# Altium PCB shelfControl.PcbDoc
Units mm, origin at the board's own origin, x right, y up, seen from the top; angles counter-clockwise.
Board outline 152.4 x 101.6 mm, 2 copper layers (Top Layer, Bottom Layer); 73 components, 56 nets, 184 pads, 9 vias.
Unrouted connection lines stored in the file: 77.
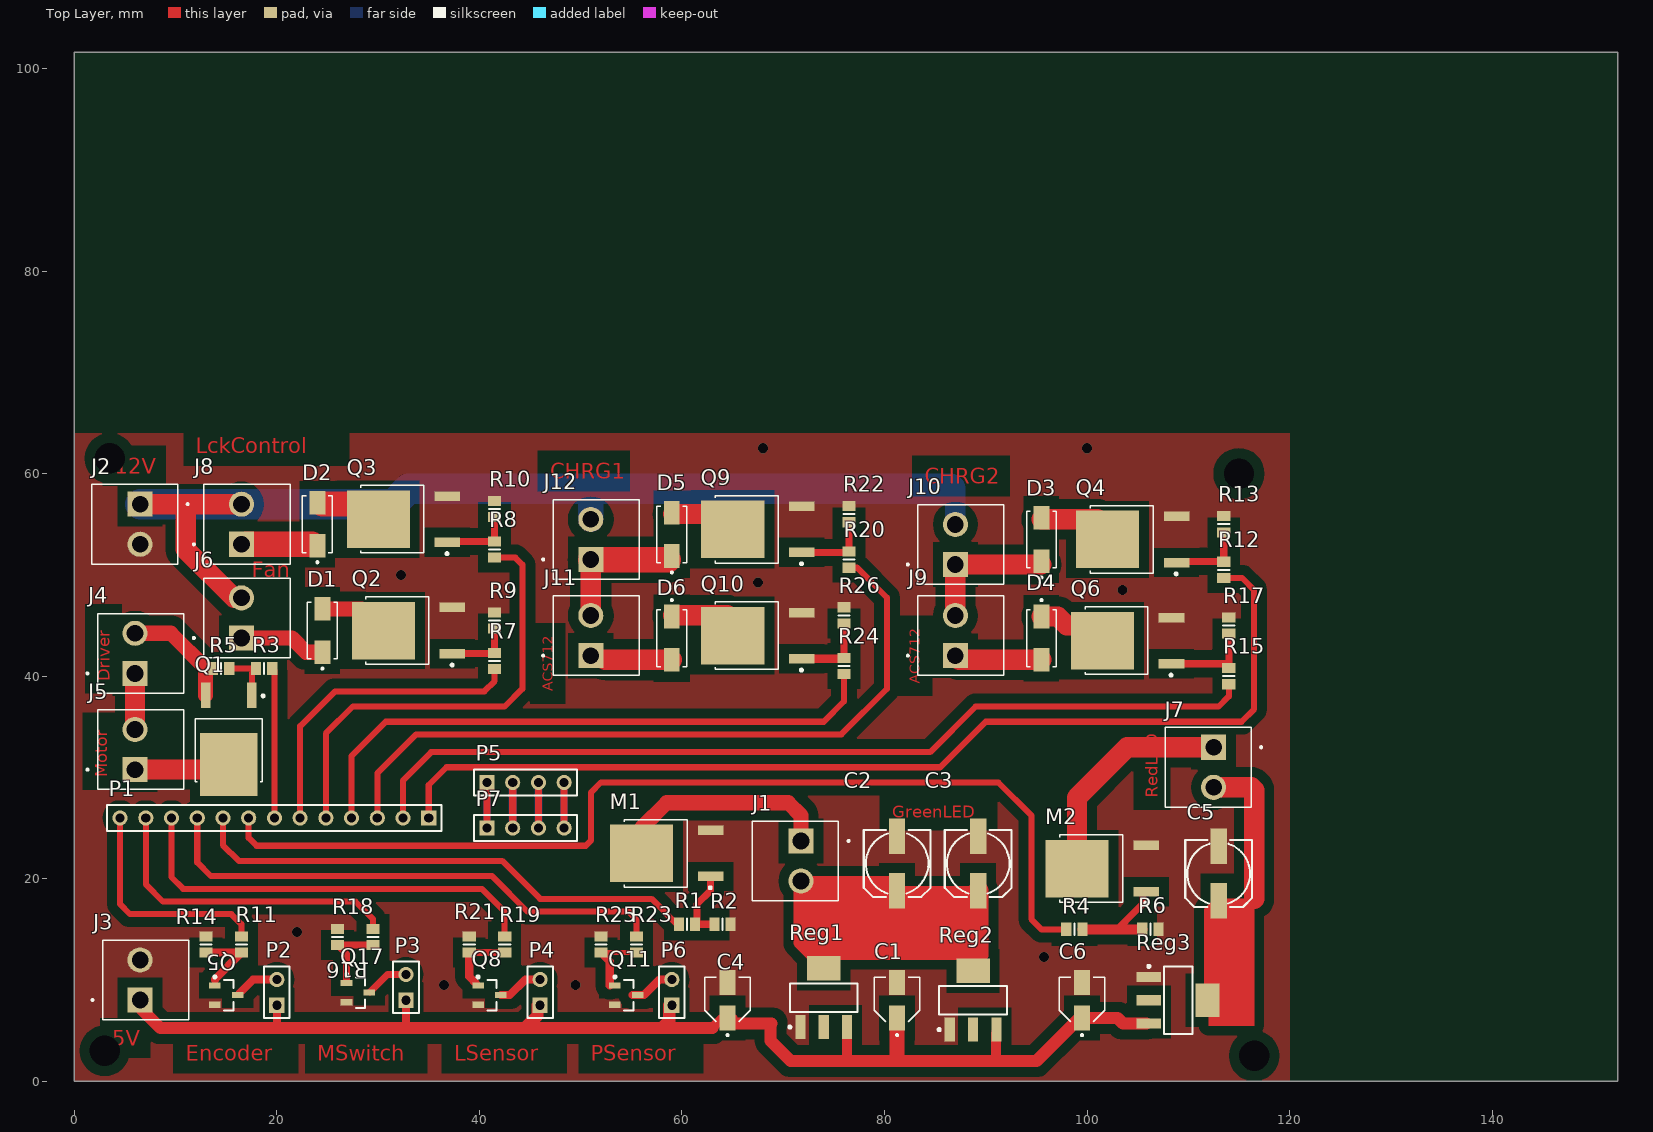
[diagram p0: Top Layer view]
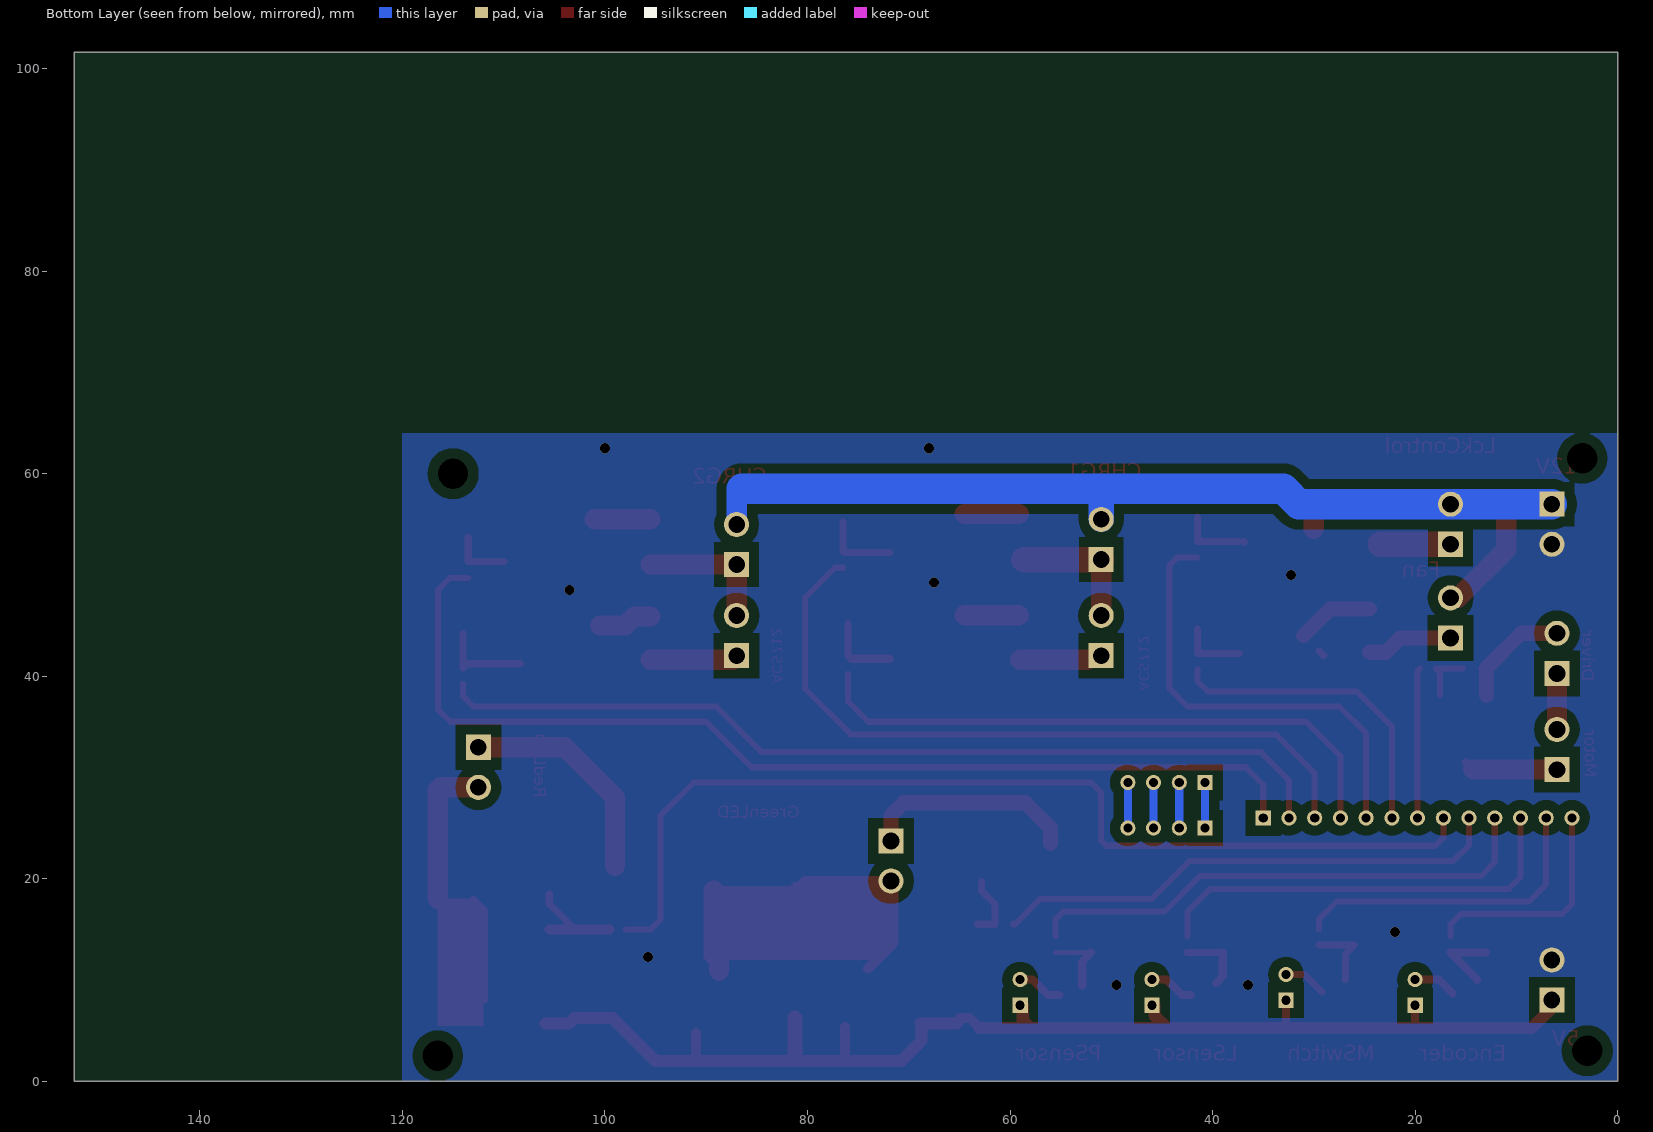
[diagram p1: Bottom Layer view, seen from below]

## Layer stack, top to bottom
Top Solder: solder mask 0.0102, Solder Resist, Dk 3.5
Top Layer: signal copper 0.0356
Dielectric 1: dielectric 0.32, FR-4, Dk 4.8
Bottom Layer: signal copper 0.0356
Bottom Solder: solder mask 0.0102, Solder Resist, Dk 3.5

## Board outline
0,0 152.4,0 152.4,101.6 0,101.6

## Design rules (kind name [scope] priority, off if disabled: settings)
Clearance [All] p1: gap=1 ignorepadtopadclearanceinfootprint=FALSE
PlaneConnect [All] p1: planeconnectstyle=Direct reliefexpansion=0.508 reliefentries=4 reliefconductorwidth=0.254 reliefairgap=0.254
PolygonConnect [All] p1: connectstyle=Direct reliefconductorwidth=0.254 reliefentries=4 polygonreliefangle="90 Angle" airgapwidth=0.254
RoutingVias [All] p1: holewidth=0.711 width=1.27 viastyle="Through Hole" minholewidth=0.711 minwidth=1.27 maxholewidth=0.711 maxwidth=1.27
SolderMaskExpansion [All] p1: expansion=0.102
Width [All] p1: maxlimit=0.254 minlimit=0.254 preferedwidth=0.254
29 further rules are at their usual default settings.

## Components (designator, comment, footprint, x,y, rotation, side; value= is the part's Value field where it differs from the comment)
C1 "4mm Electrolytic-10nf" *CAP_EEE-FP1C100AR 81.25,8 r90 top
C2 "100uf" *CAPAE0607X600N_16SVPC100M(Primary) 81.25,21.5 r270 top
C3 "100uf" *CAPAE0607X600N_16SVPC100M(Primary) 89.25,21.5 r270 top
C4 "4mm Electrolytic-10nf" *CAP_EEE-FP1C100AR 64.5,8 r90 top
C5 "100uf" *CAPAE0607X600N_16SVPC100M(Primary) 113,20.5 r270 top
C6 "4mm Electrolytic-10nf" *CAP_EEE-FP1C100AR 99.5,8 r90 top
D1 "SM330A" *DIOM5227X270N_S1M(Primary) 24.5,44.5 r90 top
D2 "SM330A" *DIOM5227X270N_S1M(Primary) 24,55 r90 top
D3 "SM330A" *DIOM5227X270N_S1M(Primary) 95.5,53.5 r90 top
D4 "SM330A" *DIOM5227X270N_S1M(Primary) 95.5,43.75 r270 top
D5 "SM330A" *DIOM5227X270N_S1M(Primary) 59,54 r90 top
D6 "SM330A" *DIOM5227X270N_S1M(Primary) 59,43.75 r270 top
J1 "6-1123723-2" *TE_6-1123723-2 71.75,21.75 r270 top
J2 "6-1123723-2" *TE_6-1123723-2 6.5,55 r270 top
J3 "6-1123723-2" *TE_6-1123723-2 6.5,10 r90 top
J4 "6-1123723-2" *TE_6-1123723-2 6,42.25 r90 top
J5 "6-1123723-2" *TE_6-1123723-2 6,32.75 r90 top
J6 "6-1123723-2" *TE_6-1123723-2 16.5,45.75 r90 top
J7 "6-1123723-2" *TE_6-1123723-2 112.5,31 r270 top
J8 "6-1123723-2" *TE_6-1123723-2 16.5,55 r90 top
J9 "ACS712Measure" *TE_6-1123723-2 87,44 r90 top
J10 "6-1123723-2" *TE_6-1123723-2 87,53 r90 top
J11 "ACS712Measure" *TE_6-1123723-2 51,44 r90 top
J12 "6-1123723-2" *TE_6-1123723-2 51,53.5 r90 top
M1 "PHD45N03" *DPAK228P998X235-3N 58.5,22.5 r90 top
M2 "PHD45N03" *DPAK228P998X235-3N 101.5,21 r90 top
P1 "Header 13" HDR1X13 35,26 r180 top
P2 "Header 2" HDR1X2 20,7.5 r90 top
P3 "Header 2" HDR1X2 32.75,8 r90 top
P4 "Header 2" HDR1X2 46,7.5 r90 top
P5 "Header 4" HDR1X4 40.75,29.5 r0 top
P6 "Header 2" HDR1X2 59,7.5 r90 top
P7 "Header 4" HDR1X4 40.75,25 r0 top
Q1 "PHD45N03" *DPAK228P998X235-3N 15.25,33.75 r180 top
Q2 "PHD45N03" *DPAK228P998X235-3N 33,44.5 r90 top
Q3 "PHD45N03" *DPAK228P998X235-3N 32.5,55.5 r90 top
Q4 "PHD45N03" *DPAK228P998X235-3N 104.5,53.5 r90 top
Q5 "s9018" SOT-23_N 15,8.5 r0 top
Q6 "PHD45N03" *DPAK228P998X235-3N 104,43.5 r90 top
Q8 "s9018" SOT-23_N 41,8.5 r0 top
Q9 "PHD45N03" *DPAK228P998X235-3N 67.5,54.5 r90 top
Q10 "PHD45N03" *DPAK228P998X235-3N 67.5,44 r90 top
Q11 "s9012" SOT-23_N 54.5,8.5 r0 top
Q17 "s9018" SOT-23_N 28,8.75 r0 top
R1 "Res1" 6-0805_L 60.5,15.5 r0 top value=1K
R2 "Res1" 6-0805_L 64,15.5 r180 top value=430
R3 "Res1" 6-0805_L 18.75,40.75 r180 top value=1K
R4 "Res1" 6-0805_L 98.75,15 r0 top value=1K
R5 "Res1" 6-0805_L 14.5,40.75 r0 top value=470
R6 "Res1" 6-0805_L 106.25,15 r180 top value=470
R7 "Res1" 6-0805_L 41.5,41.5 r90 top value=1K
R8 "Res1" 6-0805_L 41.5,52.5 r90 top value=1K
R9 "Res1" 6-0805_L 41.5,45.5 r270 top value=470
R10 "Res1" 6-0805_L 41.5,56.5 r270 top value=470
R11 "Res1" 6-0805_L 16.5,13.5 r270 top value=4.7K
R12 "Res1" 6-0805_L 113.5,50.5 r90 top value=1K
R13 "Res1" 6-0805_L 113.5,55 r270 top value=470
R14 "Res1" 6-0805_L 13,13.5 r90 top value=2k2
R15 "Res1" 6-0805_L 114,40 r90 top value=1K
R16 "Res1" 6-0805_L 29.5,14.25 r90 top value=4.7K
R17 "Res1" 6-0805_L 114,45 r270 top value=470
R18 "Res1" 6-0805_L 26,14.25 r270 top value=2k2
R19 "Res1" 6-0805_L 42.5,13.5 r270 top value=4.7K
R20 "Res1" 6-0805_L 76.5,51.5 r90 top value=1K
R21 "Res1" 6-0805_L 39,13.5 r90 top value=2k2
R22 "Res1" 6-0805_L 76.5,56 r270 top value=470
R23 "Res1" 6-0805_L 55.5,13.5 r270 top value=4.7K
R24 "Res1" 6-0805_L 76,41 r90 top value=1K
R25 "Res1" 6-0805_L 52,13.5 r90 top value=2k2
R26 "Res1" 6-0805_L 76,46 r270 top value=470
Reg1 "AMS1117-3.3" SOT223_N 74,8.25 r90 top
Reg2 "AMS1117-3.3" SOT223_N 88.75,8 r90 top
Reg3 "AMS1117-2.5" SOT223_N 109,8 r0 top

## Footprints (in the part's own frame and the unit in brackets; to place one, negate y for a bottom-side part, rotate by r counter-clockwise, add the part's x,y. Pads: shape width x height; smd on the part's side, far side on the other; paste and mask are expansions set on the pad)
6-0805_L [mm] "Chip Resistor, Body 2.0x1.2mm, IPC High Density"
  rect 1x1.3 smd: 1(-0.8,0) 2(0.8,0)
  silkscreen extent 0,-0.55 0,0.55, body extent -1.07,-0.7 1.07,0.7, height 0.7
*CAP_EEE-FP1C100AR [mm]
  rect 2.5x1.6 smd: 1(-1.75,0) 2(1.75,0)
  silkscreen extent -3.55,-2.25 2.25,2.25
*CAPAE0607X600N_16SVPC100M(Primary) [mm]
  rect 3.5x1.6 smd: NEG(-2.7,0) POS(2.7,0)
  silkscreen extent -3.3,-3.3 3.3,3.3
*DIOM5227X270N_S1M(Primary) [mm]
  rect 2.33x1.56 smd: A(2.14,0) C(-2.14,0)
  silkscreen extent -3.85,-1.48 2.8,1.48
*DPAK228P998X235-3N [mm]
  rect 0.94x2.52 smd: 1(-2.28,-4.34) 3(2.28,-4.34)
  rect 5.67x6.23 smd: 2(0,2.48)
  silkscreen extent -3.52,-4.42 3.33,4.2
*TE_6-1123723-2 [mm]
  rect 2.475x2.475 hole 1.65: 1(-1.98,0)
  round 2.475 hole 1.65: 2(1.98,0)
  silkscreen extent -3.93,-4.8 3.93,4.8
HDR1X2 [mm] "Connector; Header; 2 Position"
  rect 1.5x1.5 hole 0.9: 1(0,0)
  round 1.5 hole 0.9: 2(2.54,0)
  silkscreen extent -1.27,-1.27 3.81,1.27
HDR1X4 [mm] "Connector; Header; 4 Position"
  rect 1.5x1.5 hole 0.9: 1(0,0)
  round 1.5 hole 0.9: 2(2.54,0) 3(5.08,0) 4(7.62,0)
  silkscreen extent -1.27,-1.27 8.89,1.27
HDR1X13 [mm] "Connector; Header; 13 Position"
  rect 1.5x1.5 hole 0.9: 1(0,0)
  round 1.5 hole 0.9: 2(2.54,0) 3(5.08,0) 4(7.62,0) 5(10.16,0) 6(12.7,0) 7(15.24,0) 8(17.78,0) 9(20.32,0) 10(22.86,0) 11(25.4,0) 12(27.94,0) 13(30.48,0)
  silkscreen extent -1.27,-1.27 31.75,1.27
SOT223_N [mm] "SOT223, 4-Leads, Body 6.5x3.5mm, Pitch 2.3mm, Lead Span 7mm, IPC Medium Density"
  rect 2.4x1 smd: 1(-2.9,2.3) 2(-2.9,0) 3(-2.9,-2.3)
  rect 2.4x3.3 smd: 4(2.9,0)
  silkscreen extent -3.02,-3.35 1.4,3.47, body extent -1.85,-3.35 1.85,3.35, height 1.7
SOT-23_N [mm] "SOT23, 3-Leads, Body 2.9x1.3mm, Pitch 0.95mm, Lead Span 2.5mm, IPC Medium Density"
  rect 1.15x0.6 smd: 1(-1.125,0.95) 2(-1.125,-0.95) 3(1.125,0)
  silkscreen extent -1.25,-1.5 0.7,1.92, body extent -0.7,-1.5 0.7,1.5, height 1.1

## Part data
C1 C4 C6: library part EEE-FP1C100AR, "Electrolytic capacitor SMD 10 µF 16 V 20 % _Ø x L_ 4 mm x 5.8 mm Panasonic EEEFP1C100AR 1 pc_s_", Package="Radial Panasonic", Availability=Unavailable, MF="Panasonic Electronic", MP=EEEFP1C100AR, Price=None, SnapEDA_Link=https://www.snapeda.com/parts/EEEFP1C100AR/Panasonic%20Electronic%20Components/view-part/?ref=snap
C2 C3 C5: library part 16SVPC100M, "SVPC Series 16 V 100 uF Ø 6.3 x 5.9 mm Surface Mount Polymer Aluminum Capacitor", Package="Radial Panasonic", Availability=Unavailable, MF=Panasonic, MP=16SVPC100M, Price=None, SnapEDA_Link=https://www.snapeda.com/parts/16SVPC100M/Panasonic%20Electronic%20Components/view-part/?ref=snap
D1 D2 D3 D4 D5 D6: library part STPS2L60A, "SCHOTTKY RECTIFIER 2A; Voltage Vrrm: 60V; Diode Case Style: DO-214AC; Case Style: DO-214AC", Package="DO-214 STMicroelectronics", Availability=Unavailable, MF=STMicroelectronics, MP=STPS2L60A, Price=None, SnapEDA_Link=https://www.snapeda.com/parts/STPS2L60A/STMicroelectronics/view-part/?ref=snap
J1 J2 J3 J4 J5 J6 J7 J8 J10 J12: "3.96 EP HDR ASSY 2P_GREEN_", Package=None, Availability=Unavailable, Centerline_Pitch="3.96 mm[.156 in]", EU_RoHS_Compliance=Compliant, MF="TE Connectivity", MP=6-1123723-2, Number_of_Positions=2, Price=None, Product_Type=Header, SnapEDA_Link=https://www.snapeda.com/parts/6-1123723-2/TE%20Connectivity%20AMP%20Connectors/view-part/?ref=snap, TE_purchase_URL=https://www.te.com/usa-en/product-6-1123723-2.html?te_bu=Cor&te_type=disp&te_campaign=seda_glo_cor-seda-global-disp-prtnr-fy19-seda-model-bom-cta_sma-317_1&elqCampaignId=32493
J9 J11: library part 6-1123723-2, "3.96 EP HDR ASSY 2P_GREEN_", Package=None, Availability=Unavailable, Centerline_Pitch="3.96 mm[.156 in]", EU_RoHS_Compliance=Compliant, MF="TE Connectivity", MP=6-1123723-2, Number_of_Positions=2, Price=None, Product_Type=Header, SnapEDA_Link=https://www.snapeda.com/parts/6-1123723-2/TE%20Connectivity%20AMP%20Connectors/view-part/?ref=snap, TE_purchase_URL=https://www.te.com/usa-en/product-6-1123723-2.html?te_bu=Cor&te_type=disp&te_campaign=seda_glo_cor-seda-global-disp-prtnr-fy19-seda-model-bom-cta_sma-317_1&elqCampaignId=32493
M1 M2 Q1 Q2 Q3 Q4 Q6 Q9 Q10: library part IPD50P04P4L-11, "P-Channel 40 V 10.6 mOhm OptiMOS®-P2 Power-Transistor -PG-TO-252-3", Package="TO-252-3 Infineon", Availability=Unavailable, MF="Infineon Technologies", MP=IPD50P04P4L-11, Price=None, SnapEDA_Link=https://www.snapeda.com/parts/IPD50P04P4L-11/Infineon%20Technologies/view-part/?ref=snap
P1: "Header, 13-Pin", LatestRevisionDate=17-Jul-2002, LatestRevisionNote="Re-released for DXP Platform.", Publisher="Altium Limited"
P2 P3 P4 P6: "Header, 2-Pin", LatestRevisionDate=17-Jul-2002, LatestRevisionNote="Re-released for DXP Platform.", Publisher="Altium Limited"
P5 P7: "Header, 4-Pin", LatestRevisionDate=17-Jul-2002, LatestRevisionNote="Re-released for DXP Platform.", Publisher="Altium Limited"
Q5 Q8 Q11 Q17: library part MOSFET-P, "P-Channel MOSFET", LatestRevisionDate=17-Jul-2002, LatestRevisionNote="Re-released for DXP Platform.", PackageDescription="TO, Flat Index; 3 In-Line, Axial Leads; Body Dia. 4.6mm; Lead Dia. 0.5 mm (max)", PackageReference=E3, PackageVersion=1995/1996, Published=8-Jun-2000, Publisher="Altium Limited"
R1 R2 R3 R4 R5 R6 R7 R8 R9 R10 R11 R12 R13 R14 R15 R16 R17 R18 R19 R20 R21 R22 R23 R24 R25 R26: "Resistor", LatestRevisionDate=17-Jul-2002, LatestRevisionNote="Re-released for DXP Platform.", PackageDescription="Axial Device, Thru-Hole; 2 Leads; 0.3 in Pin Spacing", PackageReference=AXIAL-0.3, Published=8-Jun-2000, Publisher="Altium Limited"
Reg1 Reg2 Reg3: library part MOSFET-P4, "P-Channel MOSFET, Externally Terminated Substrate", Code_IPC=SOT223-4, Code_JEDEC=TO-261-AA-B, Code_JEITA=SC-75, LatestRevisionDate=29-May-2009, LatestRevisionNote="IPC-7351 Footprint Added.", PackageDescription="4-Pin SOT-223 Package 2.3 mm Pitch, 7 mm Lead Span", PackageReference=SOT223, PackageVersion=2002, Published=24-Mar-1999, Publisher="Altium Limited"

## Free pads (board coordinates)
  round 1.524 hole 3: 18(3,3) 19(3.5,61.5) 20(115,60) 22(116.5,2.5)

## Via types
v1: diameter 1, hole 1, Top Layer to Bottom Layer, 9 vias

## Nets (pads, with @x,y where several pads share a name; then routed paths per layer and width w, separated by ;. In a path a pad name is that pad's centre, name@x,y a point inside that pad or via, vN(x,y) a via of type N, cw(c..) or ccw(c..) an arc to the next point about the centre after c; other vN are vias at no path point)
2.5V: C5.POS J7.2 Reg3.2 Reg3.4
3.3V: C2.POS C3.POS J1.2 Reg1.2 Reg1.4 Reg2.2 Reg2.4
5V: C1.1 C4.1 C6.1 J3.1 P2.1 P3.1 P4.1 P6.1 Reg1.3 Reg2.3 Reg3.3 | length 79
  Top Layer w1.2: J3.1@6.465,7.517 6.465,7.285 8.5,5.25 44.5,5.25 ; P4.1@45.75,7.5 45.75,6.5 44.5,5.25 ; P6.1@58.75,7.5 58.75,6 58,5.25 ; 63,5.25 58,5.25 ; C4.1@65.25,5.7 68.85,5.7 ; 68.75,5.6 68.75,4 70.75,2 78.75,2 ; 44.5,5.25 58,5.25
12V: J2.1 J10.2 J12.2 | length 102.6
  Top Layer w2: J2.1 11,56.98 ; 11,57 11,56.98 ; 16.5,47.73 15.77,47.73 11,52.5 11,56.98 ; 16.5,56.98 11,56.98
  Bottom Layer w3: J2.1 31.48,56.98 33,58.5 86.5,58.5
Charger1Measure: P1.12 R15.1
Charger1Normal: P1.13 R12.1
Charger2Measure: P1.10 R24.1
Charger2Normal: P1.11 R20.1
DriverPin1: J4.2 Q1.3 R5.1
DriverPin2: J4.1 J5.2
Encoder: P1.6 R11.1
EncoderOut: P5.1 P7.1
Fan: P1.5 R7.1
GND: C1.2 C2.NEG C3.NEG C4.2 C5.NEG C6.2 J2.2 J3.2 M1.3 M2.3 Q2.3 Q3.3 Q4.3 Q5.2 Q6.3 Q8.2 Q9.3 Q10.3 Q11.2 Q17.2 R2.1 R6.1 R9.1 R10.1 R13.1 R14.2 R17.1 R18.1 R21.2 R22.1 R25.2 R26.1 Reg1.1 Reg2.1 Reg3.1
  other v1: 36.5,9.5 49.5,9.5 95.75,12.25 22,14.75 103.5,48.5 67.5,49.25 32.25,50 68,62.5 100,62.5
GreenLEDControl: P1.1 R1.1
LockControl: P1.3 R8.1
LockSensor: P1.8 R19.1
LockSensorOut: P5.3 P7.3
MicroSwitch: P1.7 R16.2
MicroSwitchOut: P5.2 P7.2 | length 4
  Top Layer w0.7: P7.2 P5.2@43.29,29
Motor: P1.4 R3.1
NetD1_2: D1.A J6.2
NetD2_2: D2.A J8.2
NetD3_1: J9.2 J10.1
NetD3_2: D3.A Q4.2 | length 5.5
  Top Layer w2: D3.A@95.5,55.5 Q4.2@101,55.5
NetD4_1: D4.A J9.1
NetD4_2: Q6.2 | length 0.7
  Top Layer w0.7: 95.5,41 96,41.5
NetD5_1: D5.A J11.2 J12.1
NetD5_2: Q9.2 | length 5.6
  Top Layer w0.7: 59,56.14 59.14,56
  Top Layer w2: 59.14,56 Q9.2@64.5,56
NetD6_1: D6.A J11.1
NetD6_2: Q10.2
NetJ1_1: J1.1 M1.2
NetJ5_1: J5.1 Q1.2
NetJ6_1: J6.1 Q2.2
NetJ7_1: J7.1 M2.2
NetJ8_1: J8.1 Q3.2
NetM1_1: M1.1 R1.2 R2.2
NetM2_1: M2.1 R4.2 R6.2
NetP2_2: P2.2 Q5.3
NetP3_2: P3.2 Q17.3
NetP4_2: P4.2 Q8.3
NetP6_2: P6.2 Q11.3
NetQ1_1: Q1.1 R3.2 R5.2
NetQ2_1: Q2.1 R7.2 R9.2
NetQ3_1: Q3.1 R8.2 R10.2
NetQ4_1: Q4.1 R12.2 R13.2
NetQ5_1: Q5.1 R11.2 R14.1
NetQ6_1: Q6.1 R15.2 R17.2
NetQ8_1: Q8.1 R19.2 R21.1
NetQ9_1: Q9.1 R20.2 R22.2
NetQ10_1: Q10.1 R24.2 R26.2
NetQ11_1: Q11.1 R23.2 R25.1
NetQ17_1: Q17.1 R16.1 R18.2
PhoneSensor: P1.9 R23.1
PhoneSensorOut: P5.4 P7.4
RedLEDControl: P1.2 R4.1
pads on no net: D1.C D2.C D3.C D4.C D5.C D6.C
copper on no net: | length 1120.5
  Top Layer w0.5: 52,12.7 55.5,12.7
  Top Layer w0.6: 4.52,26 4.52,17.48 5.5,16.5 15.5,16.5 16.5,15.5 16.5,14.3 ; 7.06,26 7.06,19.44 8.75,17.75 13.25,17.75 27.75,17.75 29.5,16 29.5,15.05 ; 9.6,26 9.6,20.15 10.75,19 40.25,19 42.5,16.75 42.5,14.3 ; 12.14,26 12.14,21.61 13.5,20.25 41.25,20.25 44.75,16.75 54.75,16.75 55.5,16 55.5,14.3 ; 14.68,26 14.68,23.32 16.25,21.75 42.25,21.75 46,18 57,18 59.5,15.5 59.7,15.5 ; 15.3,40.75 17.95,40.75 17.53,40.33 17.53,38.09 ; 17.22,26 17.22,24.03 18,23.25 50.5,23.25 51,23.75 51,28.5 52,29.5 53.75,29.5 91.25,29.5 94.5,26.25 94.5,16 95.5,15 97.95,15 ; 19.55,40.75 19.76,40.54 19.76,26 ; 22.3,26 22.3,35.05 25.75,38.5 40.5,38.5 41.5,39.5 41.5,40.7 ; 24.84,26 24.84,34.34 27.5,37 42.5,37 44.25,38.75 44.25,51 43.55,51.7 41.5,51.7 ; 27.38,26 27.38,32.13 30.75,35.5 74,35.5 76,37.5 76,40.2 ; 29.92,26 29.92,30.42 33.75,34.25 75.75,34.25 80.25,38.75 80.25,47.75 77.3,50.7 76.5,50.7 ; 32.46,26 32.46,29.71 35.25,32.5 84.5,32.5 89,37 113,37 114,38 114,39.2 ; 35,26 35,29.25 36.75,31 85.5,31 90,35.5 115.25,35.5 116.5,36.75 116.5,48.5 115.3,49.7 113.5,49.7
  Top Layer w0.7: 26.875,10 26.875,12.575 26,13.45 29.5,13.45 ; 29.02,42.02 29.5,42.5 ; 29.188,8.812 30.915,10.54 32.75,10.54 ; 36.84,53.22 36.92,53.3 ; 37.34,42.22 41.42,42.22 41.5,42.3 41.5,44.7 ; 37.42,53.3 41.5,53.3 41.5,55.7 ; 39,12.7 42.5,12.7 ; 40.75,25 40.75,29 ; 45.83,25 45.83,28.92 ; 48.37,25 48.37,29 ; 58.5,51.5 59,51 ; 58.64,51.5 59,51.86 ; 62.84,19.72 62.84,18.84 61.5,17.5 61.5,15.5 63.2,15.5 ; 71.84,52.22 76.42,52.22 76.5,52.3 76.5,55.2 ; 75.72,41.72 76,42 76,45.2 ; 87,51.02 87.48,51.5 ; 95.48,51.02 95.5,51 ; 103.25,15.25 104.5,16.5 105.5,17.5 105.5,18.5 ; 108.34,41.22 113.58,41.22 114,40.8 114,44.2 ; 109.92,51.3 113.5,51.3 113.5,53.7 ; 111.9,8 111.9,16.9 113,18
  Top Layer w0.8: 13,12.7 16.5,12.7 13.875,10.075 13.875,10 ; 14.27,30.77 15,31.5 ; 16.312,8.687 17.665,10.04 20,10.04 ; 20,5.5 20,7.5 ; 32.75,5.5 32.75,8 ; 39,12.7 39,10.325 39.663,9.663 ; 42.125,8.5 43,8.5 44.54,10.04 46,10.04 ; 52,12.7 52.875,11.825 52.875,9.45 ; 55.125,8.5 56.25,8.5 57.79,10.04 59,10.04 ; 71.84,41.72 75.72,41.72
  Top Layer w1: 63.25,5.5 64,6.25 65,6.25 ; 74,11.15 71.5,13.65 71.5,19.52 71.75,19.77 80.28,19.77 81.25,18.8 89.25,18.8 ; 76.3,1.95 76.3,5.35 ; 91,2 91,4.75 ; 99.55,15 105.45,15
  Top Layer w1.2: 78.75,2 95,2 99.25,6.25 103,6.25 103.55,5.7 105.85,5.7
  Top Layer w1.5: 6,44.23 9.52,44.23 13,40.75 12.97,40.72 12.97,38.09 ; 16.5,43.77 21.48,43.77 22.89,42.36 24.5,42.36 ; 24.5,46.64 28.38,46.64 31,44.02 ; 56.02,23.5 56.02,25.02 58.5,27.5 70.5,27.5 71.75,26.25 71.75,24.73 ; 81.25,2.25 81.25,6.25
  Top Layer w2: 6,30.77 14.27,30.77 ; 6,34.73 6,40.27 ; 30.02,54.52 30.02,55.5 ; 51,45.98 51,51.5 ; 52.41,41.61 59,41.61 ; 59.11,46 64.5,46 ; 87,42 87.39,41.61 95.5,41.61 ; 87,46 87,51.02 95.48,51.02 ; 88.75,10.9 88.75,12 89.25,12.5 89.25,18.8 ; 95.5,45.89 97.11,45.89 98,45 100.5,45 ; 99,21.25 99,28 103.98,32.98 112.5,32.98 ; 112.5,29.02 116.23,29.02 116.5,28.75 116.5,18
  Top Layer w2.5: 17,53.02 23.48,53.02 ; 24.5,57 29.5,57 ; 51,51.5 58.64,51.5
  Bottom Layer w0.8: 40.75,25 40.75,29 ; 43.29,25 43.29,29 ; 45.83,25 45.83,29 ; 48.37,25.37 48.37,29
  Bottom Layer w2: 87,54.98 87,58.5
  Bottom Layer w2.5: 51,55.48 51,58.5

## Polygon pours and split planes (outlines as drawn)
GND on Bottom Layer "Bottom Layer-GND" (solid, remove dead copper, pour order 2): 0,0 120,0 120,64 0,64
GND on Top Layer "Top Layer-GND" (solid, remove dead copper, pour order 0): 0,0 120,0 120,64 0,64

## Other copper
Top Layer:
  region net 3.3V: 88.75,12 73.25,12 71.5,13.75 71.5,19.52 81.02,19.52 81.25,19.75 82.2,18.8 89.25,18.8
  region net 2.5V: 111.9,16.9 113,18 116.5,18 116.5,5.5 112.01,5.5
  region: 73.5,9.5
  text "LckControl" at 12,62 h1.52
  text "12V" at 4,60 h1.52
  text "CHRG1" at 47,59.5 h1.52
  text "CHRG2" at 84,59 h1.52
  text "Fan" at 17.5,49.75 h1.52
  text "Driver" at 3.5,39.5 h1.2 r90
  text "ACS712" at 83.5,39.25 h1 r90
  text "ACS712" at 47.25,38.5 h1 r90
  text "Motor" at 3.25,30 h1.2 r90
  text "RedLED" at 107,28 h1.2 r90
  text "GreenLED" at 80.75,26 h1.2
  text "5V" at 3.75,3.5 h1.52
  text "Encoder" at 11,2 h1.52
  text "MSwitch" at 24,2 h1.52
  text "LSensor" at 37.5,2 h1.52
  text "PSensor" at 51,2 h1.52